# Altium PCB doorCard.PcbDoc
Units mm, origin at the board's own origin, x right, y up, seen from the top; angles counter-clockwise.
Board outline 80 x 45 mm, 2 copper layers (Top Layer, Bottom Layer); 26 components, 27 nets, 95 pads, 39 vias.
Unrouted connection lines stored in the file: 2.
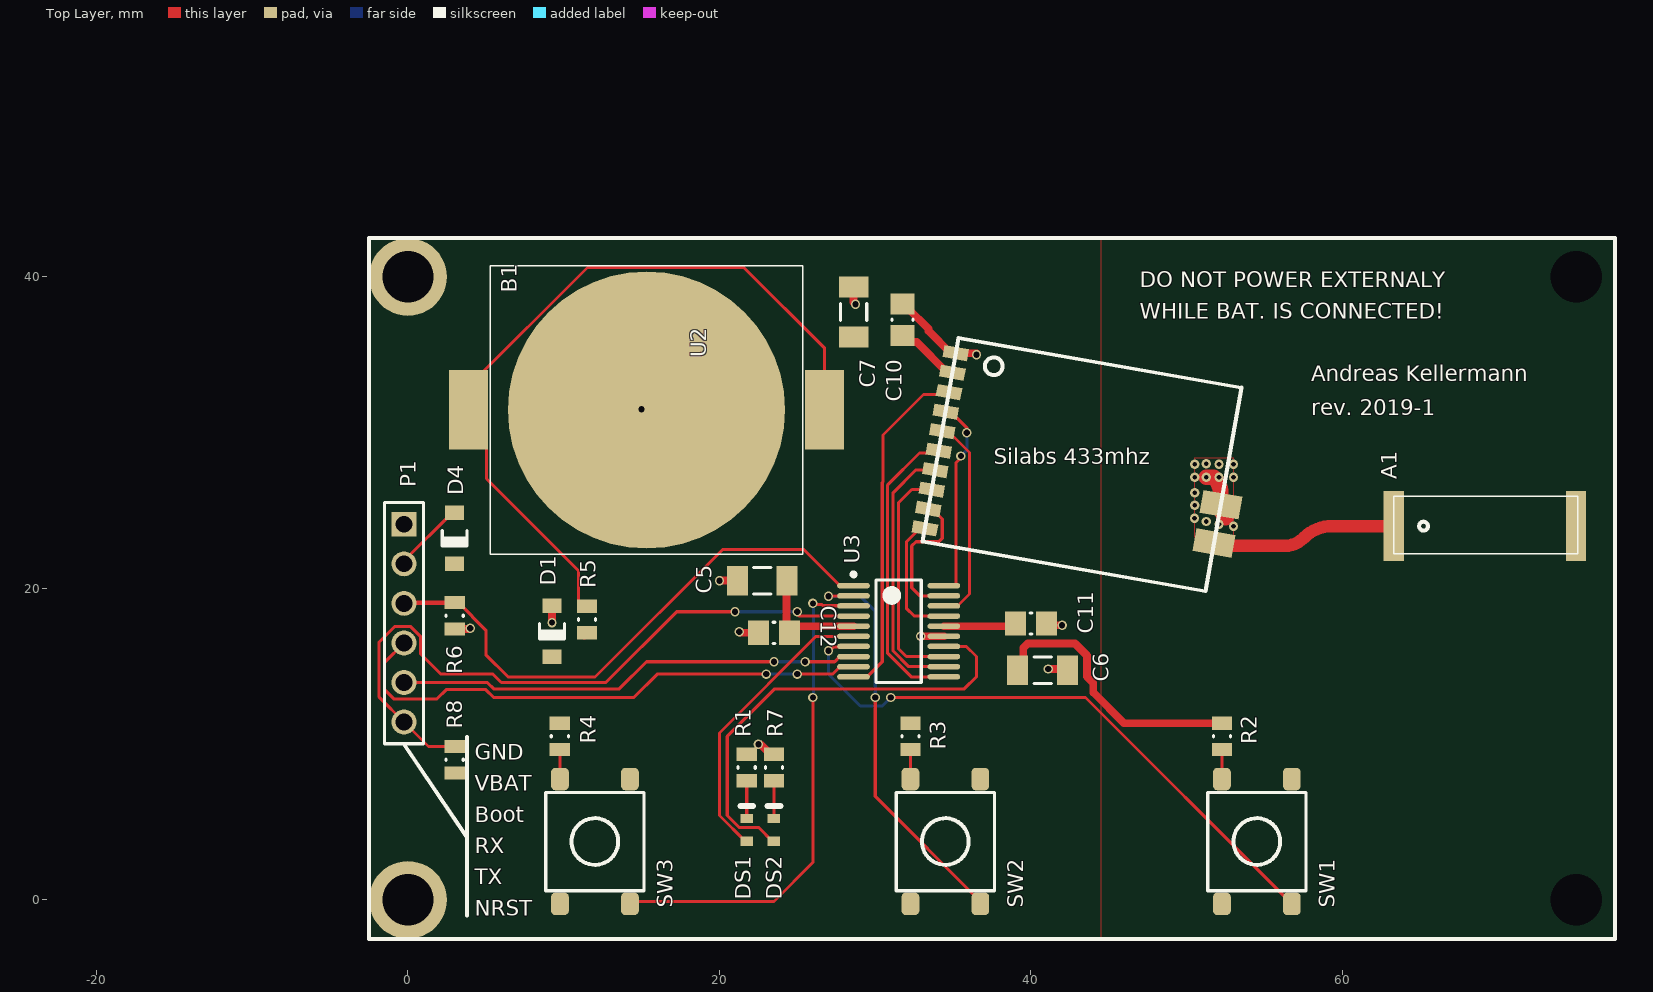
[diagram p0: Top Layer view]
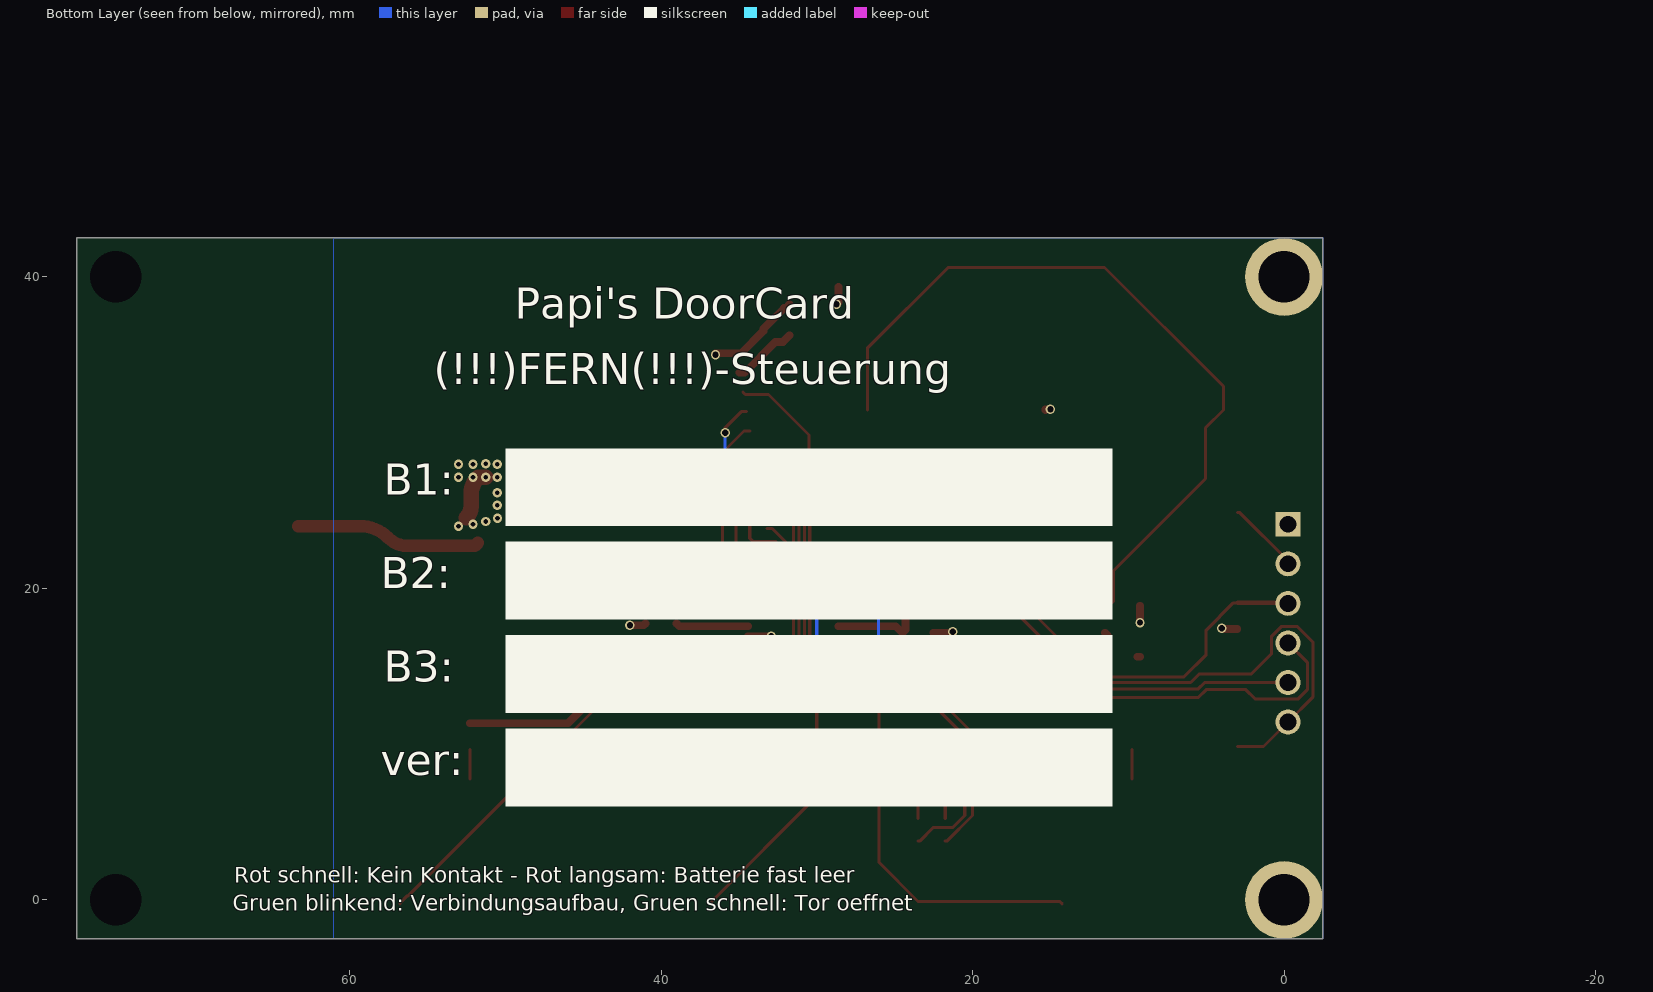
[diagram p1: Bottom Layer view, seen from below]

## Layer stack, top to bottom
Top Solder: solder mask 0.0102, Solder Resist, Dk 3.5
Top Layer: signal copper 0.0356
Dielectric 1: dielectric 0.32, FR-4, Dk 4.8
Bottom Layer: signal copper 0.0356
Bottom Solder: solder mask 0.0102, Solder Resist, Dk 3.5

## Board outline
-2.5,-2.5 -2.5,42.5 77.5,42.5 77.5,-2.5

## Design rules (kind name [scope] priority, off if disabled: settings)
Clearance [All] p1: gap=0.15 ignorepadtopadclearanceinfootprint=FALSE
PolygonConnect [All] p1: thpad.connectstyle=Relief thpad.reliefconductorwidth=0.254 thpad.reliefentries=4 thpad.polygonreliefangle="90 Angle" thpad.airgapwidth=0.2 smdpad.connectstyle=Relief smdpad.reliefconductorwidth=0.254 smdpad.reliefentries=4 smdpad.polygonreliefangle="90 Angle" smdpad.airgapwidth=0.15 via.connectstyle=Direct via.reliefconductorwidth=0.254 via.reliefentries=4 via.polygonreliefangle="90 Angle" via.airgapwidth=0.254
RoomDefinition DoorCard [InComponentClass('DoorCard')] p1: confinementstyle=ConfineIn formatcopy=TRUE lockcomponents=FALSE outline -71.25,-22.75 -20.45,-22.75 -20.45,2.65 -71.25,2.65
RoutingVias [All] p1: holewidth=0.4 width=0.6 viastyle="Through Hole" minholewidth=0.4 minwidth=0.6 maxholewidth=1 maxwidth=2
SolderMaskExpansion [All] p1: expansion=0.102
Width [All] p1: maxlimit=10 minlimit=0.15 preferedwidth=0.254
30 further rules are at their usual default settings.

## Components (designator, comment, footprint, x,y, rotation, side; value= is the part's Value field where it differs from the comment)
A1 "ANT" 433MHz_Antenna 63.3,24 r0 top
B1 "CR2016" CR2012 15.32,31.46 r180 top
C5 "CAP 47uF 6.3V 1206(3216)" CAPC1206(3216)190_M 22.75,20.5 r0 top value=47uF
C6 "CAP 47uF 6.3V 1206(3216)" CAPC1206(3216)190_M 40.75,14.75 r180 top value=47uF
C7 "CAP 47uF 6.3V 1206(3216)" CAPC1206(3216)190_M 28.61,37.75 r270 top value=47uF
C10 "1uF" CAPC0805(2012)100_M 31.75,37.25 r270 top
C11 "1uF" CAPC0805(2012)100_M 40,17.75 r180 top
C12 "1uF" CAPC0805(2012)100_M 23.5,17.15 r0 top
D1 "MMSD4148T3G" ONSC-SOD123-2-425G-04_V 9.25,17.25 r90 top
D4 "MMSD4148T3G" ONSC-SOD123-2-425G-04_V 3,23.227 r90 top
DS1 "TLMS1100-GS08" VISH-TLMX1100_V 21.75,4.5 r90 top
DS2 "TLMS1100-GS08" VISH-TLMX1100_V 23.5,4.5 r90 top
P1 "PHT-106-01-L-S" SMTC-PHT-106-01-X-S -0.25,24.12 r270 top
R1 "10k" RESC0805(2012)_L 21.75,8.5 r270 top value="10200.00 Ohm"
R2 "10k" RESC0805(2012)_L 52.26,10.5 r90 top value="10200.00 Ohm"
R3 "10k" RESC0805(2012)_L 32.26,10.5 r270 top value="10200.00 Ohm"
R4 "10k" RESC0805(2012)_L 9.75,10.5 r90 top value="10200.00 Ohm"
R5 "FUSE" RESC0805(2012)_L 11.5,18 r90 top value="10200.00 Ohm"
R6 "10k" RESC0805(2012)_L 3,18.25 r90 top value="10200.00 Ohm"
R7 "10k" RESC0805(2012)_L 23.5,8.5 r270 top value="10200.00 Ohm"
R8 "10k" RESC0805(2012)_L 3,9 r270 top value="10200.00 Ohm"
SW1 "DTSM-61NT/R" DIPT-DTSM-6_V 54.5,3.75 r90 top
SW2 "DTSM-61NT/R" DIPT-DTSM-6_V 34.5,3.75 r90 top
SW3 "DTSM-61NT/R" DIPT-DTSM-6_V 12,3.75 r90 top
U2 "Si4463" E10-433MS 33.195,23.849 r350 top
U3 "STM32F070F6P6" STM-TSSOP20_M 31.51,17.25 r0 top

## Footprints (in the part's own frame and the unit in brackets; to place one, negate y for a bottom-side part, rotate by r counter-clockwise, add the part's x,y. Pads: shape width x height; smd on the part's side, far side on the other; paste and mask are expansions set on the pad)
433MHz_Antenna [mm] "ANT1204F002R0433A"
  rect 1.3x4.5 smd: 1(0,0) 2(11.7,0)
  silkscreen extent 0,-1.78 11.81,1.91
CAPC0805(2012)100_M [mm] "Chip Capacitor, Body 2.0x1.2mm, Height 1.0mm, IPC Low Density"
  rect 1.35x1.55 smd: 1(-1,0) 2(1,0)
  silkscreen extent -0.05,-0.67 0.05,0.67, body extent -1.1,-0.72 1.1,0.72, height 1
CAPC1206(3216)190_M [mm] "Chip Capacitor, Body 3.2x1.6mm, Height 1.9mm, IPC Low Density"
  rect 1.35x1.9 smd: 1(-1.6,0) 2(1.6,0)
  silkscreen extent -0.55,-0.85 0.55,0.85, body extent -1.7,-0.9 1.7,0.9, height 1.9
CR2012 [mm] "BAT-HLD-002-SMT"
  rect 2.5x5.1 smd: 1(-11.43,0) 1(11.43,0)
  round 17.8 smd paste-17.8: 2(0,0)
  silkscreen extent -10.03,-9.27 10.03,9.27
DIPT-DTSM-6_V [mm] "Switch, Through-Hole, 4 Leads, Body 8.5x8.5mm, Row Spacing 9.0mm, Pitch 4.5mm"
  rrect50% 1.448x1.143 smd: 1(4.01,-2.25) 2(-4,-2.25) 3(4.01,2.24) 4(-4,2.24)
  silkscreen extent -3.16,-3.16 3.15,3.15, body extent -4.5,-3.1 4.5,3.1, height 4.5
E10-433MS [mm] "Si4463"
  rect 1.6x0.8 smd: 1(0,11.43) 2(0,10.16) 3(0,8.89) 4(0,7.62) 5(0,6.35) 6(0,5.08) 7(0,3.81) 8(0,2.54) 9(0,1.27) 10(0,0)
  rect 2.54x1.5 smd: 11(18.45,2.31) 12(18.45,4.8)
  silkscreen extent 0,-0.84 18.45,12.43
ONSC-SOD123-2-425G-04_V [mm] "SOD123, 2-Leads, Body 2.69x1.6mm, Height 1.35mm"
  rect 0.915x1.22 smd: 1(-1.637,0) 2(1.637,0)
  silkscreen extent -0.5,-0.8 0.5,0.8, body extent -1.35,-0.8 1.35,0.8, height 1.35
RESC0805(2012)_L [mm] "Chip Resistor, Body 2.0x1.3mm, IPC High Density"
  rect 0.85x1.3 smd: 1(-0.85,0) 2(0.85,0)
  silkscreen extent -0.05,-0.55 0.05,0.55, body extent -1.1,-0.67 1.1,0.68, height 0.7
SMTC-PHT-106-01-X-S [mm] "Press Fit Socket Assembly, 1x6 Pins, Vertical, 2.54mm Pitch, Male"
  rect 1.6x1.6 hole 1.081: 1(0,0)
  round 1.6 hole 1.081: 2(2.54,0) 3(5.08,0) 4(7.62,0) 5(10.16,0) 6(12.7,0)
  silkscreen extent -1.4,-1.24 14.1,1.24, body extent -1.26,-1.25 13.96,1.25, height 8.38
STM-TSSOP20_M [mm] "SOP, 20-Leads, Body 6.6x4.5mm, Pitch 0.65mm, IPC Low Density"
  oval 2.1x0.35 smd: 1(-2.9,2.925) 2(-2.9,2.275) 3(-2.9,1.625) 4(-2.9,0.975) 5(-2.9,0.325) 6(-2.9,-0.325) 7(-2.9,-0.975) 8(-2.9,-1.625) 9(-2.9,-2.275) 10(-2.9,-2.925) 11(2.9,-2.925) 12(2.9,-2.275) 13(2.9,-1.625) 14(2.9,-0.975) 15(2.9,-0.325) 16(2.9,0.325) 17(2.9,0.975) 18(2.9,1.625) 19(2.9,2.275) 20(2.9,2.925)
  silkscreen extent -3.02,-3.3 1.45,3.77, body extent -2.25,-3.3 2.25,3.3, height 1.2
VISH-TLMX1100_V [mm] "SMD, 2-Leads, Body 1.6x0.8mm"
  rect 0.6x0.8 smd: 1(-0.725,0) 2(0.725,0)
  silkscreen extent 1.53,-0.4 1.53,0.4, body extent -0.8,-0.4 0.8,0.4, height 0.65

## Part data
A1: library part ANT1204F002R0433A, "ANT1204F002R0433A"
B1: library part BAT-HLD-002-SMT, "BAT-HLD-002-SMT"
C5 C6 C7: library part CMP-1037-05000-1, "CAP 47uF 6.3V ±20% 1206 (3216 Metric) Thickness 1.9mm SMD", Case-EIA=1206, Case-Metric=3216, Rated Voltage="6.3 V", Tolerance=±20%, Max Thickness="1.9 mm", Technology=SMT
C10 C11 C12: library part CMP-1036-04754-1, "CAP 1uF 25V ±10% 0805 (2012 Metric) Thickness 1mm SMD", Case-EIA=0805, Case-Metric=2012, Rated Voltage="25 V", Tolerance=±10%, Max Thickness="1 mm", Technology=SMT
D1 D4: library part CMP-0895-00002-1, "Switching Diode, 100 V, 200 mA, -55 to 150 degC, 2-Pin SOD123 (425), RoHS, Tape and Reel", Manufacturer="ON Semiconductor", Temperature Range="-55 to 150 degC", CD (Max)="4 pF", ComponentLink1Description="Manufacturer URL", ComponentLink1URL=http://www.onsemi.com/, ComponentLink2Description=Datasheet, ComponentLink2URL=http://www.onsemi.com/pub_link/Collateral/MMSD4148T1-D.PDF, ComponentLink3Description="Package Specification", ComponentLink3URL=http://www.onsemi.com/pub_link/Collateral/425-04.PDF, DatasheetVersion="Rev. 11", IR @ VR="75 V (Max)=50 uA", Mounting Technology="Surface Mount", PackageDescription="2-Pin SOD123, Body 2.69 x 1.6 mm, Height 1.35 mm", PackageReference=SOD123-2-425G-04, PackageVersion="Rev. 04G", Packing="Tape and Reel", PartNumber=MMSD4148T3G, PD (Max)="425 mW", RoHS=TRUE, Trr (Max)="4 ns", VBR (Min)="100 V", VF (Max)="1 A"
DS1 DS2: library part CMP-1666-00027-1, "LED, RED, 2.1 V, -40 to 100 degC, 2-Pin SMD (0603), RoHS, Tape and Reel", Capacitance="12 pF", Case/Package=0603, Case Code (Metric)=1608, Max Operating Temperature=125degC, Min Operating Temperature=-55degC, Package Quantity=4000, Resistance="100000000000 Ohm", Tolerance=5%, Type (Capacitors)=C0G, Voltage Rating="50 V", Case Code (Imperial)=0603, ComponentLink1Description="Manufacturer URL", ComponentLink1URL=http://www.vishay.com/, ComponentLink2Description=Datasheet, ComponentLink2URL=http://www.vishay.com/docs/83173/tlmb1100.pdf, DatasheetVersion="Rev. 2.7, 03/2016", Height="0.8 mm", Length="1.6 mm", Mount="Surface Mount", PackageDescription="2-Pin Surface Mount Device, Body 1.6 x 0.8 mm", PackageReference=TLMX1100, Packaging="Tape and Reel", Pins=2, Radiation Hardening=No, REACH SVHC="No SVHC", RoHSCompliant=True, Voltage Rating (DC)="50 V", Width="0.8 mm"
P1: library part CMP-1024-00187-1, "Press Fit Header, Through-hole, Vertical, -55 to 125 degC, 2.54 mm Pitch, 6-Pin, Male, RoHS", Manufacturer=Samtec, Temperature Range="-55 to 125 degC", ComponentLink1Description="Manufacturer URL", ComponentLink1URL=http://www.samtec.com, ComponentLink2Description=Datasheet, ComponentLink2URL=http://www.samtec.com/documents/webfiles/pdf/pht.pdf, ComponentLink3Description="Package Specification", ComponentLink3URL=http://www.samtec.com/documents/webfiles/cpdf/PHT-1XX-XX-X-X-XXX-MKT.pdf, DatasheetVersion=F-214, Mounting Technology=Through-hole, Orientation=Vertical, PackageDescription=".100 Press Fit Socket Assembly", PackageReference=PHT-106-01-X-S, PackageVersion="J, 9/2009", PartNumber=PHT-106-01-L-S, Pitch="2.54 mm", RoHS=True
R1 R2 R3 R4 R6 R7 R8: library part CMP-1013-00624-1, "10K2 0.125W 1% 0805 (2012 Metric)  SMD", Case-EIA=0805, Case-Metric=2012, Power="0.125 W", Tolerance="1 %", Technology=SMT
R5: library part CMP-1013-00624-1, "PTC Fuse", Case-EIA=0805, Case-Metric=2012, Power="0.125 W", Tolerance="1 %", Technology=SMT
SW1 SW2 SW3: library part CMP-0306-00001-1, "Switch, SPNO Push Button SMD", Manufacturer=Diptronics, ComponentLink1Description="Manufacturer URL", ComponentLink1URL=http://www.dip.com.tw/, ComponentLink2Description=Datasheet, ComponentLink2URL=http://www.dip.com.tw/Products_tact.htm, ComponentLink3Description="Package Specification", ComponentLink3URL=http://www.dip.com.tw/PDF/pro_tact/DTSM_G_-6_2_-V.pdf, Mechanical Life="200,000 cycles", Mounting Technology="Through Hole", PackageDescription="Switch, Through-Hole, 4 Leads, Body 8.5x8.5mm, Row Spacing 9.0mm, Pitch 4.5mm", PackageReference=DTSM-6, Packing Type=Tape&Reel, PartNumber=DTSM-61NT/R
U2: library part Component_1, "E10-433MS"
U3: library part CMP-0304-00145-2, "ARM Cortex-M0 32-bit MCU, 32 KB Flash, 6 KB Internal RAM, 15 I/Os, 20-Pin TSSOP, -40 to 85 degC, Tray", I/Os (High Current)=15, Manufacturer=STMicroelectronics, Operating Frequency(F) (Processor speed) (MHz)=48, Package Description="20-Pin Thin Shrink Small Outline Package, Body 6.5 x 4.4 mm, Pitch 0.65 mm", Package Reference=TSSOP20, Supply Voltage(Vcc) min (V)=2.4, ComponentLink1Description="Manufacturer URL", ComponentLink1URL=http://www.st.com/, ComponentLink2Description=Datasheet, ComponentLink2URL=http://www.st.com/st-web-ui/static/active/en/resource/technical/document/datasheet/DM00141386.pdf, Core="ARM Cortex-M0", DatasheetVersion="Rev. 3", FLASH Size (Prog) (kB)=32, Internal RAM Size (kB)=6, Mounting Technology="Surface Mount", Packing=Tray, PartNumber=STM32F070F6P6

## Free pads (board coordinates)
  round 5 hole 3.3: 1(0,0) 5(0,40)
  round 1 hole 3.3: 4(75,0) 6(75,40)

## Via types
v1: diameter 0.6, hole 0.3, Top Layer to Bottom Layer, tented both sides, 14 vias
v2: diameter 0.6, hole 0.4, Top Layer to Bottom Layer, tented bottom, 14 vias
v3: diameter 0.6, hole 0.4, Top Layer to Bottom Layer, tented both sides, 11 vias

## Nets (pads, with @x,y where several pads share a name; then routed paths per layer and width w, separated by ;. In a path a pad name is that pad's centre, name@x,y a point inside that pad or via, vN(x,y) a via of type N, cw(c..) or ccw(c..) an arc to the next point about the centre after c; other vN are vias at no path point)
ANT: A1.1 U2.11 | length 12
  Top Layer w0.8: U2.11 51.953,22.733 56.311,22.733 ccw(c56.311,24.414) 57.5,23.225 57.531,23.256 cw(c59.327,21.46) 59.327,24 A1.1
BOOT0: P1.3 R6.2 U3.1 | length 36.1
  Top Layer w0.2: R6.2@2.97,19.07 3.255,19.07 5,17.325 5,15.739 6.429,14.31 12.012,14.31 20.202,22.5 25.41,22.5 27.735,20.175 U3.1
  Top Layer w0.3: P1.3 -0.22,19.07 R6.2@2.97,19.07
GND: B1.2 C5.1 C6.1 C7.1 C10.1 C11.1 C12.1 D1.2 P1.1 pad.1 pad.5 R1.1 R6.1 R7.1 U2.1 U2.12 U3.15 | length 20.6
  Top Layer w0.5: R6.1 3.952,17.4 v3(4,17.448) ; v3(9.25,17.805) D1.2 ; v3(15,31.5) 15.32,31.5 B1.2 ; v3(20,20.5) C5.1 ; v3(21.271,17.216) 21.337,17.15 C12.1 ; v3@22.5,9.973 22.508,9.981 22.644,9.981 23.275,9.35 R7.1 ; C7.1 28.61,38.377 v3(28.737,38.25) ; C10.1 32,38 32.1,38 33.424,36.676 33.424,36.537 34.855,35.106 36.5,35.106 v3(36.5,35) ; v3(32.919,16.925) U3.15 ; C11.1 41.11,17.639 v3(42,17.639) ; v3(41.11,14.824) 42.276,14.824 C6.1
  Top Layer w1: v1(51.25,27.131) 51.75,27.131 cw(c50.669,26.05) 52.198,26.05 U2.12 52.198,25.259 ccw(c53.229,25.259) 52.5,24.53
  other v1: 53,24 52.073,24.12 51.25,24.293 50.5,24.5 50.514,25.351 50.514,26.15 50.514,27.131 52.073,27.131 53,27.131 50.514,27.971 52.073,27.971 53,27.971 51.25,28
  other v3: 22.5,10
GPIO0: U2.3 U3.10 | length 22.2
  Top Layer w0.2: U3.10 29.485,14.325 30.45,15.29 30.45,26.795 30.5,26.845 30.5,29.85 33.099,32.449 34.583,32.449 U2.3
GPIO1: U2.4 U3.20 | length 13
  Top Layer w0.2: U3.20 35.116,20.175 35.185,20.244 35.185,28.077 35.5,28.392 v2(35.5,28.5) ; U2.4 34.842,31.354 35.883,30.313 v2(35.883,30)
  Bottom Layer w0.2: v2(35.5,28.5) 35.883,28.883 v2(35.883,30)
IRQ: U2.5 U3.18 | length 13.4
  Top Layer w0.2: U2.5 34.675,30.103 36.05,28.728 36.05,19.64 35.285,18.875 U3.18
LED_GREEN: DS2.1 U3.14 | length 30
  Top Layer w0.2: DS2.1 23.4,3.775 22.526,4.649 21.271,4.649 20.5,5.42 20.5,10.5 23.55,13.55 34.738,13.55 35.725,13.55 36.5,14.325 36.5,15.625 35.85,16.275 U3.14
LED_RED: DS1.1 U3.6 | length 18.9
  Top Layer w0.2: DS1.1 21.65,3.775 20,5.425 20,10.722 26.203,16.925 U3.6
MISO: U2.7 U3.12 | length 17.2
  Top Layer w0.2: U2.7 32.602,27.602 31.15,26.15 31.15,15.98 32.155,14.975 U3.12
MOSI: U2.8 U3.13 | length 15
  Top Layer w0.2: U2.8 32.351,26.351 31.5,25.5 31.5,16.125 32,15.625 U3.13
NetB1_1: B1.1 R5.2 | length 49.5
  Top Layer w0.2: R5.2 11.275,18.85 10.95,19.175 10.95,21.138 5.04,27.048 5.04,30.31 3.89,31.46 3.89,32.97 11.53,40.61 21.565,40.61 26.75,35.425 B1.1@26.75,31.46
NetD4_2: D4.2 P1.2 | length 4.7
  Top Layer w0.2: P1.2 -0.25,21.767 2.847,24.865 D4.2
NetDS1_2: DS1.2 R1.2 | length 2.4
  Top Layer w0.2: DS1.2 R1.2
NetDS2_2: DS2.2 R7.2 | length 2.4
  Top Layer w0.2: DS2.2 R7.2
NetR2_1: R2.1 SW1.3 | length 1.9
  Top Layer w0.2: SW1.3 R2.1
NetR3_2: R3.2 SW2.3 | length 1.9
  Top Layer w0.2: SW2.3 R3.2
NetR4_1: R4.1 SW3.3 | length 1.9
  Top Layer w0.2: R4.1 9.76,9.64 SW3.3
NRST: P1.6 R8.1 U3.4 | length 44.8
  Top Layer w0.2: R8.1 1.32,9.85 P1.6 -1.85,13.02 -1.85,16.56 -0.86,17.55 0.185,17.55 0.8,16.935 0.8,15.825 2.125,14.5 5.46,14.5 6,13.96 12.71,13.96 17.25,18.5 v2(21,18.5) ; v2(25,18.5) 25,18.392 25.117,18.275 25.117,18.225 U3.4
  Bottom Layer w0.2: v2(21,18.5) v2(25,18.5)
nSEL: U2.9 U3.19 | length 9.5
  Top Layer w0.2: U2.9 33.659,25.1 34.302,24.457 34.302,23.225 34.077,23 32.617,23 32.35,22.733 32.35,20.045 32.87,19.525 U3.19
RX: P1.4 U3.9 | length 35.1
  Top Layer w0.2: P1.4 -1.5,15.25 -1.5,13.5 -0.91,12.91 1.863,12.91 2.453,13.5 5,13.5 5.5,13 14.5,13 16,14.5 v2(23,14.5) ; v2(25,14.5) 27.26,14.5 27.735,14.975 U3.9
  Bottom Layer w0.2: v2(23,14.5) v2(25,14.5)
SCK: U2.6 U3.11 | length 19.2
  Top Layer w0.2: U2.6 33.922,28.697 32.847,28.697 30.8,26.65 30.8,15.835 32.31,14.325 U3.11
SDN: U2.10 U3.3 | length 8.4
  Top Layer w0.2: U2.10 32.87,23.849 32,22.979 32,18.725 32.5,18.225 34.41,18.225
SW1: SW1.2 U3.7 | length 39.6
  Top Layer w0.2: v2(27,16) 27.108,16 27.355,16.246 28.581,16.246 U3.7 ; v2(31,13) 43.5,13 56.241,0.259 56.293,0.259 56.75,-0.198 SW1.2
  Bottom Layer w0.2: v2(27,16) 27,14.5 29.05,12.45 30.45,12.45 v2(31,13)
SW2: SW2.2 U3.2 | length 26.6
  Top Layer w0.2: v2(27,19.5) 27.025,19.525 U3.2 ; v2(30,13) 30,6.652 36.75,-0.098 SW2.2
  Bottom Layer w0.2: v2(27,19.5) 29.04,19.5 30,18.54 v2(30,13)
SW3: SW3.2 U3.17 | length 32.2
  Top Layer w0.2: SW3.2 14.402,-0.098 23.5,-0.098 26,2.402 v2(26,13) ; v2(26,19.04) 26.077,18.963 26.585,18.963 26.661,18.887 28.597,18.887 28.61,18.875
  Bottom Layer w0.2: v2(26,13) 26.05,13.05 26.05,18.99 v2(26,19.04)
TX: P1.5 U3.8 | length 29.9
  Top Layer w0.2: P1.5 5.09,13.96 5.5,13.55 13.576,13.55 15.316,15.29 v2(23.5,15.29) ; v2(25.5,15.29) 27.398,15.29 27.733,15.625 U3.8
  Bottom Layer w0.2: v2(23.5,15.29) v2(25.5,15.29)
VCC: C5.2 C6.2 C7.2 C10.2 C11.2 C12.2 D1.1 D4.1 R2.2 R3.1 R4.2 R5.1 R8.2 U2.2 U3.5 U3.16 | length 34.7
  Top Layer w0.5: D1.1 D1.1@9.403,15.612 ; R5.1@11.325,16.975 R5.1 ; C5.2 24.3,20.45 24.3,17.35 C12.2 24.925,17.575 U3.5 ; C10.2 32.175,35.825 32.665,35.825 34.635,33.855 U2.2 ; U3.16 38.825,17.575 C11.2 ; C6.2 39.5,15.1 39.5,16.173 39.793,16.466 42.825,16.466 43.595,15.695 43.595,14.337 44,13.932 44,13.324 45.974,11.35 R2.2
pads on no net: A1.2 SW1.1 SW1.4 SW2.1 SW2.4 SW3.1 SW3.4

## Polygon pours and split planes (outlines as drawn)
VCC on Top Layer "Top Layer-VCC" (solid, shelved, pour order 8): 44.5,-2.5 44.5,42.5 -2.5,42.5 -2.5,-2.5
GND on Top Layer "Top Layer-GND" (solid, shelved, pour order 10): 50.514,23.274 50.514,28.392 53,28.392 53,23.274
GND on Bottom Layer "Bottom Layer-GND" (solid, shelved, pour order 6): 61,42.5 -2.5,42.5 -2.5,-2.5 61,-2.5

## Other copper
Top Layer:
  pour cut-out: -21.25,54.25

## Silkscreen, mask and mechanical layers (free items; w line width, h text height)
Top Overlay:
  lines w0.254: -0.25,10 3.8,4 3.8,10.45 3.8,-1 ; -2.5,-2.5 77.5,-2.5 77.5,42.5 -2.5,42.5 -2.5,-2.5
  text "DO NOT POWER EXTERNALY" at 47,39.35 h1
  text "WHILE BAT. IS CONNECTED!" at 47,37.3 h1
  text "Andreas Kellermann" at 58,33.291 h1
  text "rev. 2019-1" at 58,31.116 h1
  text "Silabs 433mhz" at 37.61,27.971 h1
  text "GND" at 4.287,9 h1
  text "VBAT" at 4.287,7 h1
  text "Boot" at 4.287,5 h1
  text "RX" at 4.287,3 h1
  text "TX" at 4.287,1 h1
  text "NRST" at 4.287,-1 h1
Bottom Overlay:
  rectangle: 11,6 50,11
  rectangle: 11,12 50,17
  rectangle: 11,18 50,23
  rectangle: 11,24 50,29
  text "Papi's DoorCard" at 49.4,37.3 h2
  text "(!!!)FERN(!!!)-Steuerung" at 54.6,33.1 h2
  text "B1:" at 57.8,26 h2
  text "B2:" at 58,20 h2
  text "B3:" at 57.8,14 h2
  text "ver:" at 58,8 h2
  text "Rot schnell: Kein Kontakt - Rot langsam: Batterie fast leer" at 67.4,1.1 h1
  text "Gruen blinkend: Verbindungsaufbau, Gruen schnell: Tor oeffnet" at 67.5,-0.7 h1
Mechanical 1:
  lines w0.254: 77.5,38.7 77.5,41.23 ccw(c76.23,41.23) 76.23,42.5 -1.5,42.5 ccw(c-1.5,41.5) -2.5,41.5 -2.5,-1.3 ccw(c-1.3,-1.3) -1.3,-2.5 76.23,-2.5 ccw(c76.23,-1.23) 77.5,-1.23 77.5,39.1